# EAGLE board attiny45board (EAGLE 6.4)
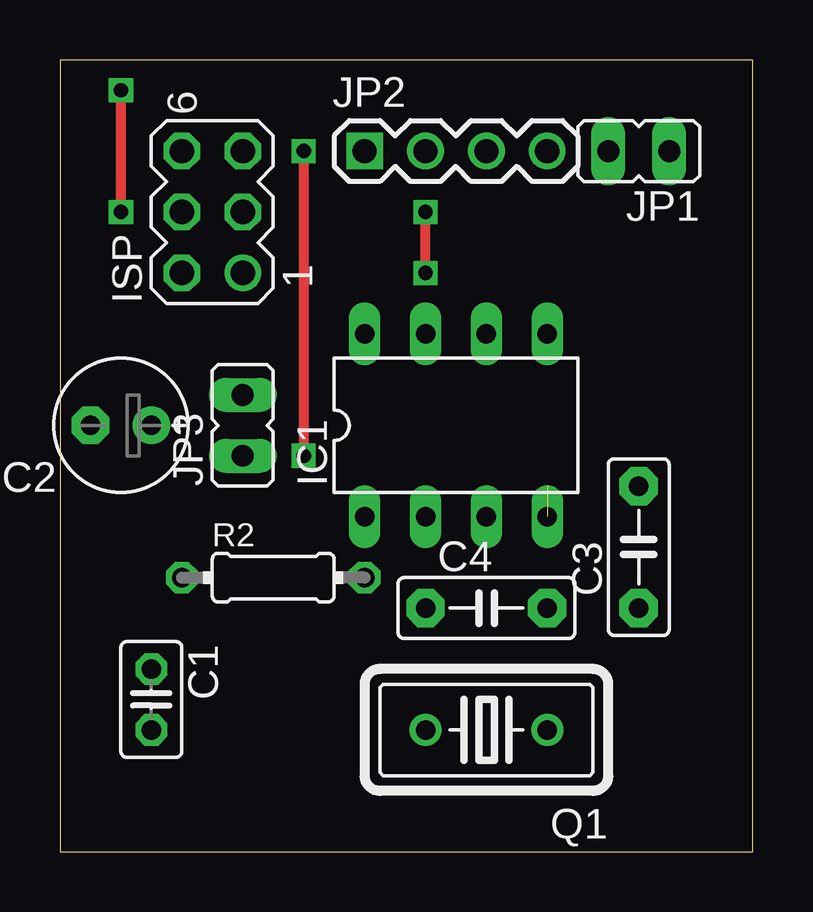
[diagram p0: board, top side]
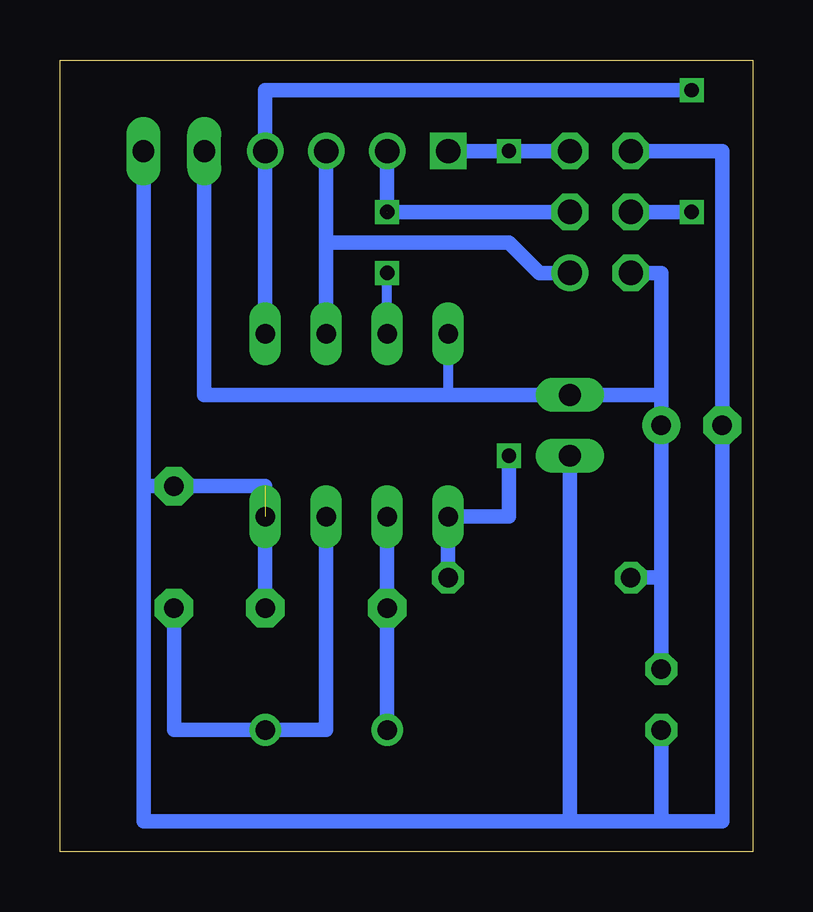
[diagram p1: board, bottom side, seen from below]

Size 28.88 x 33.01 mm. Coordinates in mm from the lower left corner, seen from the top.
Outline: 0,0 28.88,0 28.88,33.01 0,33.01 0,0
Copper layers (1*16): Top 0.035mm / dielectric 1.5mm / Bottom 0.035mm
Design rules "default": minimum track width 10mil, minimum drill 24mil, track to track 8mil, track to pad 8mil, pad to pad 8mil, via to via 8mil, smd to smd 8mil, copper to edge 40mil, drill to drill 8mil, minimum pad ring 10mil, minimum via ring 8mil, stop-mask expansion 4mil, vias tented up to drill 0mil, thermal gap 10mil

## Footprints (pad centres in the part's own frame; a part is rotated, then mirrored left to right if it is on the bottom)
C025-025X050 = drill 0.813 octagon: 1 -1.27,0; 2 1.27,0
E2,5-6E = drill 0.813 pad 1.575: + -1.27,0 | drill 0.813 pad 1.575 octagon: - 1.27,0
C5B2.5 = drill 0.813 pad 1.6 octagon: 1 -2.54,0; 2 2.54,0
DIL08 = drill 0.813 long: 1 -3.81,-3.81; 2 -1.27,-3.81; 3 1.27,-3.81; 4 3.81,-3.81; 5 3.81,3.81; 6 1.27,3.81; 7 -1.27,3.81; 8 -3.81,3.81
MA03-2 = drill 1.016: 1 -2.54,-1.27 | drill 1.016 octagon: 2 -2.54,1.27; 3 0,-1.27; 4 0,1.27; 5 2.54,-1.27; 6 2.54,1.27
JP1 = drill 0.914 long: 1 0,-1.27; 2 0,1.27
1X04 = drill 1.016 square: 1 0,0 | drill 1.016: 2 2.54,0; 3 5.08,0; 4 7.62,0
HC18U-V = drill 0.813: 1 -2.54,0; 2 2.54,0
0204/7 = drill 0.813 octagon: 1 -3.81,0; 2 3.81,0

## Placement (x,y rotation side)
C1  100n  [C025-025X050]  3.81,6.35 270 top
C2  100u  [E2,5-6E]  2.54,17.78 180 top
C3  18nf  [C5B2.5]  24.13,12.7 90 top
C4  18nf  [C5B2.5]  17.78,10.16 0 top
IC1  ATtiny13V  [DIL08]  16.51,17.78 0 top
ISP  [MA03-2]  6.35,26.67 90 top
JP1  [JP1]  24.13,29.21 90 top
JP2  [1X04]  12.7,29.21 0 top
JP3  [JP1]  7.62,17.78 0 top
Q1  8mhz  [HC18U-V]  17.78,5.08 180 top
R2  10k  [0204/7]  8.89,11.43 0 top

## Library data of the parts
C1 C2 R2 = rcl
C3 C4 = capacitor-wima
IC1 = avr
ISP = con-lstb
JP1 JP3 = jumper
JP2 = SparkFun
Q1 = crystal; OC_FARNELL: unknown; OC_NEWARK: unknown

## Nets
GND: C1.2 C2.- C3.2 C4.2 IC1.4 ISP.6 JP1.1 JP3.1
N$2: C4.1 IC1.2 Q1.2
N$3: IC1.1 ISP.5 JP2.1 R2.2
N$5: IC1.7 ISP.3 JP2.2
N$6: IC1.6 ISP.1 JP2.3
N$8: C3.1 IC1.3 Q1.1
N$10: IC1.5 ISP.4 JP2.4
VCC: C1.1 C2.+ IC1.8 ISP.2 JP1.2 JP3.2 R2.1

## Tracks (layer width: path | path; a pad name or v marks a point on that pad's centre or on a via)
GND  (1 unrouted)
  Bottom 0.61: 3.81,1.27 1.27,1.27 C2.- 1.27,29.21 ISP.6 | 3.81,1.27 7.62,1.27 | 7.62,1.27 25.4,1.27 25.4,15.24 | 25.4,15.24 C3.2 20.32,15.24 C4.2 | 25.4,15.24 JP1.1 | C1.2 3.81,1.27 | JP3.1 7.62,1.27
N$2
  Bottom 0.61: Q1.2 C4.1 IC1.2
N$3  (via drill 0.6)
  Top 0.406: v10.16,29.21 v10.16,16.51
  Bottom 0.61: R2.2 IC1.1 10.16,13.97 v10.16,16.51 | JP2.1 v10.16,29.21 ISP.5
N$4  (via drill 0.6)
  other vias: 15.24,24.13
N$5  (via drill 0.6)  (1 unrouted)
  Top 0.406: v15.24,24.13 15.24,26.67
  Bottom 0.406: IC1.7 v15.24,24.13
  Bottom 0.61: JP2.2 15.24,26.67 ISP.3
N$6
  Bottom 0.61: ISP.1 8.89,24.13 10.16,25.4 17.78,25.4 | 17.78,25.4 IC1.6 | JP2.3 17.78,25.4
N$7  (via drill 0.6)
  other vias: 15.24,26.67
N$8
  Bottom 0.61: IC1.3 17.78,5.08 Q1.1 24.13,5.08 C3.1
N$9  (via drill 0.6)
  other vias: 2.54,26.67
N$10  (via drill 0.6)
  Top 0.406: v2.54,31.75 v2.54,26.67
  Bottom 0.61: IC1.5 JP2.4 20.32,31.75 v2.54,31.75 | ISP.4 v2.54,26.67
N$11  (via drill 0.6)
  other vias: 2.54,31.75
N$12  (via drill 0.6)
  other vias: 10.16,16.51
N$13  (via drill 0.6)
  other vias: 10.16,29.21
VCC
  Bottom 0.406: IC1.8 12.7,19.05
  Bottom 0.61: JP1.2 22.86,19.05 12.7,19.05 JP3.2 3.81,19.05 | R2.1 3.81,11.43 | 3.81,11.43 C2.+ 3.81,19.05 | 3.81,11.43 C1.1 | 3.81,19.05 3.81,24.13 ISP.2